# EAGLE board de0-nano_RMII (EAGLE 8.0.2)
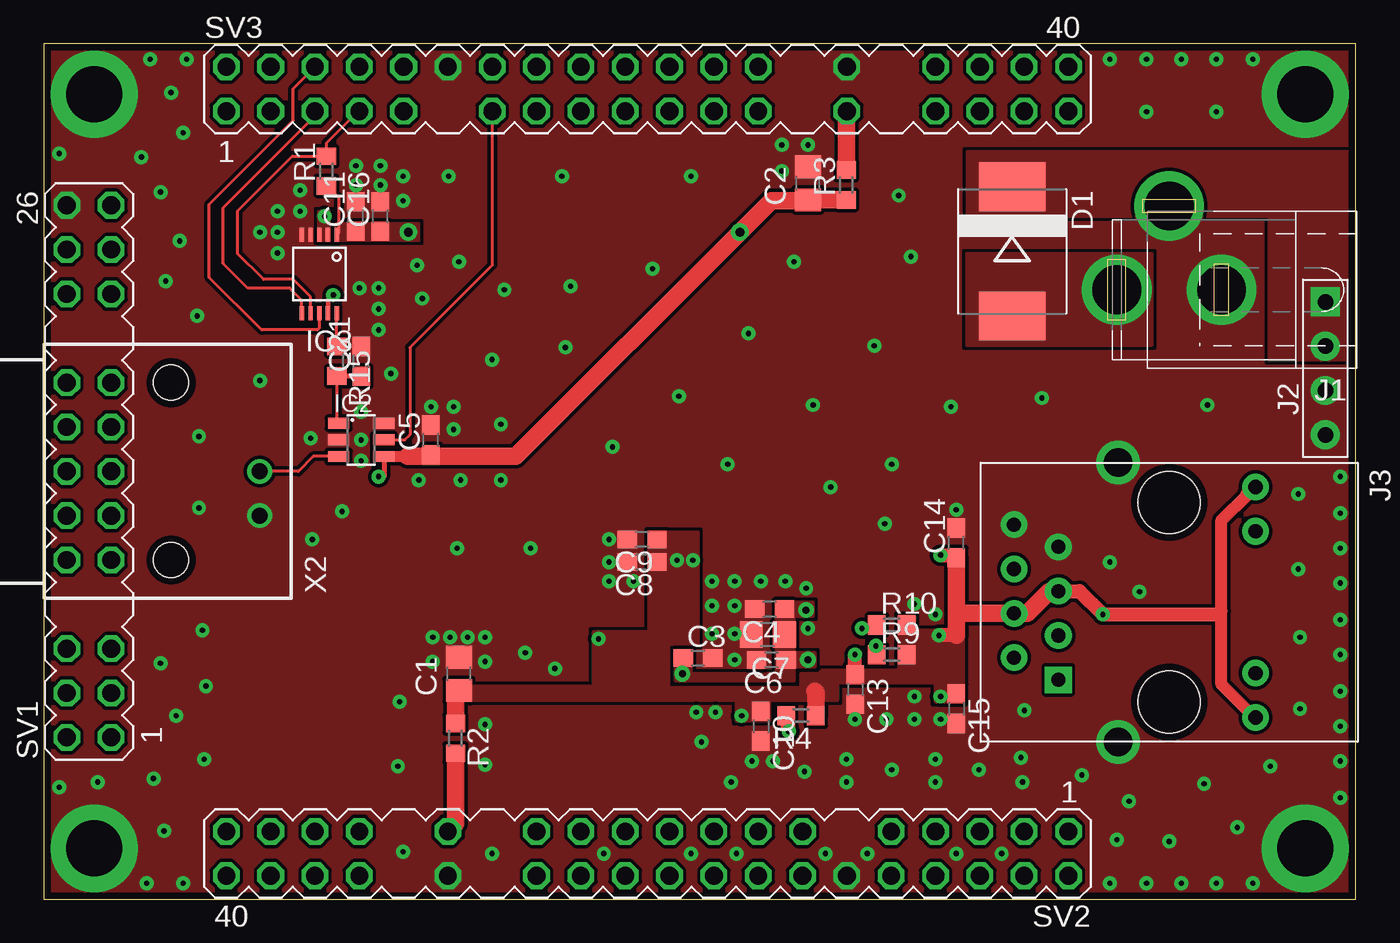
[diagram p0: board, top side]
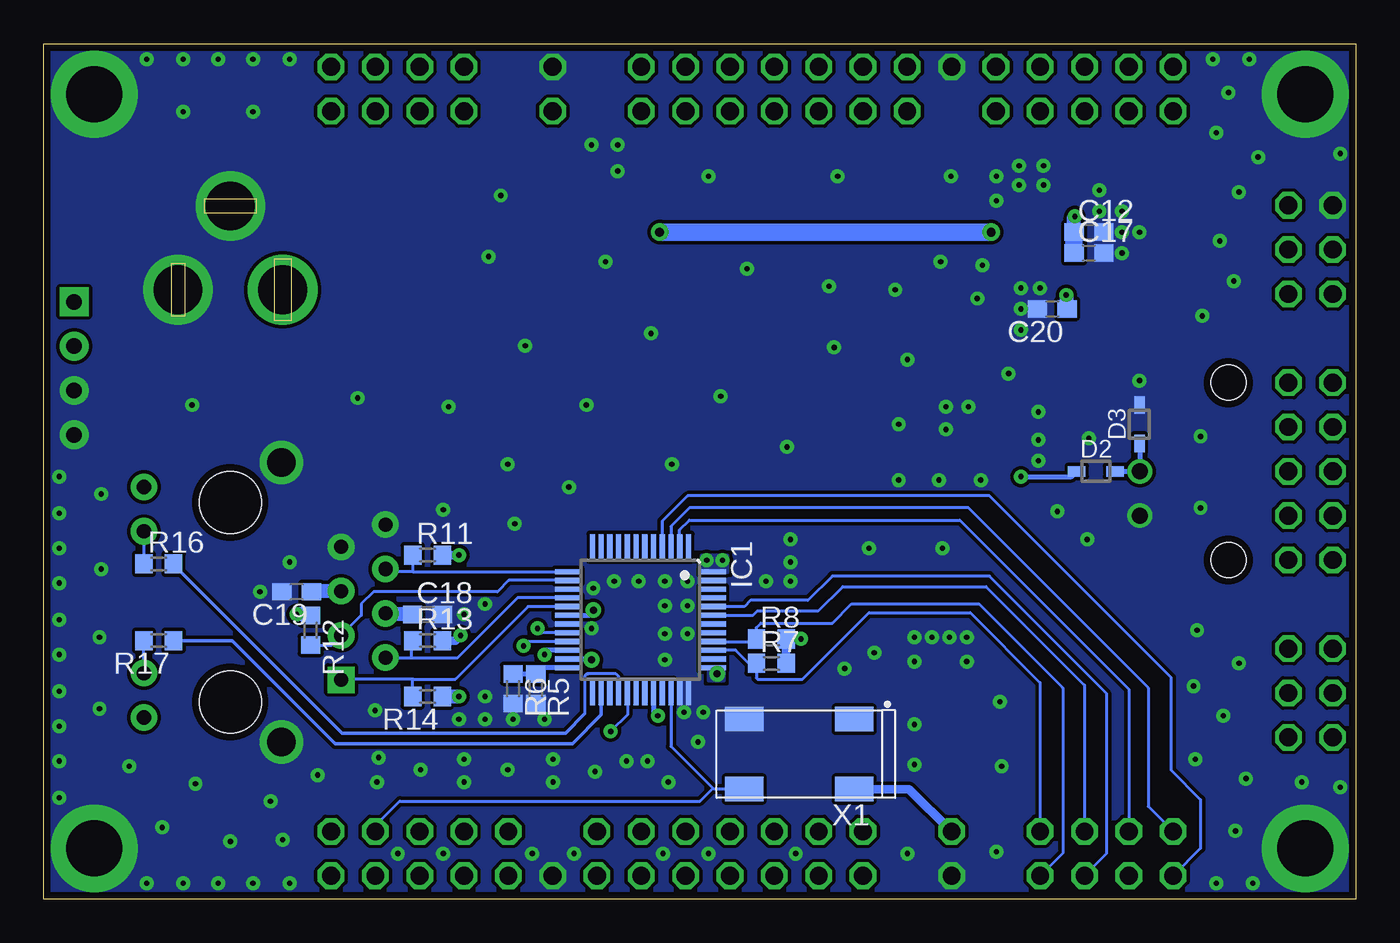
[diagram p1: board, bottom side, seen from below]

Size 75.2 x 49 mm. Coordinates in mm from the lower left corner, seen from the top.
Outline: 0,0 75.2,0 75.2,49 0,49 0,0
Copper layers (1*16): Top 0.018mm / dielectric 1.5mm / Bottom 0.018mm
Design rules "default *": minimum track width 0.18mm, minimum drill 0.3mm, track to track 0.2mm, track to pad 0.2mm, pad to pad 0.2mm, via to via 0.2mm, smd to smd 0.2mm, copper to edge 0.4mm, drill to drill 8mil, minimum pad ring 10mil, minimum via ring 8mil, stop-mask expansion 4mil, vias tented up to drill 0.4mm, thermal gap 10mil

## Footprints (pad centres in the part's own frame; a part is rotated, then mirrored left to right if it is on the bottom)
C0805 = smd 1.3 x 1.5: 1 -0.95,0; 2 0.95,0
C0603 = smd 1.1 x 1: 1 -0.85,0; 2 0.85,0
SMC = smd 2.8 x 3.8: A 3.7,0; C -3.7,0
SOD323 = smd 1 x 0.6: 1 -1.1,0; 2 1.1,0
LQFP48 = smd 1.5 x 0.3: 1 -4.15,2.75; 2 -4.15,2.25; 3 -4.15,1.75; 4 -4.15,1.25; 5 -4.15,0.75; 6 -4.15,0.25; 7 -4.15,-0.25; 8 -4.15,-0.75; 9 -4.15,-1.25; 10 -4.15,-1.75; 11 -4.15,-2.25; 12 -4.15,-2.75; 25 4.15,-2.75; 26 4.15,-2.25; 27 4.15,-1.75; 28 4.15,-1.25; 29 4.15,-0.75; 30 4.15,-0.25; 31 4.15,0.25; 32 4.15,0.75; 33 4.15,1.25; 34 4.15,1.75; 35 4.15,2.25; 36 4.15,2.75 | smd 0.3 x 1.5: 13 -2.75,-4.15; 14 -2.25,-4.15; 15 -1.75,-4.15; 16 -1.25,-4.15; 17 -0.75,-4.15; 18 -0.25,-4.15; 19 0.25,-4.15; 20 0.75,-4.15; 21 1.25,-4.15; 22 1.75,-4.15; 23 2.25,-4.15; 24 2.75,-4.15; 37 2.75,4.15; 38 2.25,4.15; 39 1.75,4.15; 40 1.25,4.15; 41 0.75,4.15; 42 0.25,4.15; 43 -0.25,4.15; 44 -0.75,4.15; 45 -1.25,4.15; 46 -1.75,4.15; 47 -2.25,4.15; 48 -2.75,4.15
TSOT23-6 = smd 0.62 x 1.22: 1 -0.95,-1.3; 2 0,-1.3; 3 0.95,-1.3; 4 0.95,1.3; 5 0,1.3; 6 -0.95,1.3
SO10 = smd 0.25 x 0.8: 1 -1,-2.25; 2 -0.5,-2.25; 3 0,-2.25; 4 0.5,-2.25; 5 1,-2.25; 6 1,2.25; 7 0.5,2.25; 8 0,2.25; 9 -0.5,2.25; 10 -1,2.25
SPC4078 = drill 2.8 pad 4: 1 -3,0; 2 0,-4.8; 3 3,0
4P-65/35MIL = drill 0.889 pad 1.651 square: 1 0,3.81 | drill 0.889 pad 1.651: 2 0,1.27; 3 0,-1.27; 4 0,-3.81
RJ45 = drill 0.813 pad 1.524: G+ 4.953,-6.604; G- 4.953,-4.064; GND -8.89,4.445; NC -6.35,3.175; P4 -8.89,-0.635; P5 -6.35,0.635; RD+ -6.35,-1.905; RD- -8.89,1.905; TD- -8.89,-3.175; Y+ 4.953,6.604; Y- 4.953,4.064 | drill 1.651 pad 2.159: SHIELD0 -2.921,8.001; SHIELD1 -2.921,-8.001 | drill 0.813 pad 1.524 square: TD+ -6.35,-4.445 | hole 3.556: 0,-5.715; 0,5.715
R0603 = smd 1 x 1.1: 1 -0.85,0; 2 0.85,0
MA13-2_ALT = drill 1.016 octagon: 1 -15.24,-1.27; 2 -15.24,1.27; 3 -12.7,-1.27; 4 -12.7,1.27; 5 -10.16,-1.27; 6 -10.16,1.27; 9 -5.08,-1.27; 10 -5.08,1.27; 11 -2.54,-1.27; 12 -2.54,1.27; 13 0,-1.27; 14 0,1.27; 15 2.54,-1.27; 16 2.54,1.27; 17 5.08,-1.27; 18 5.08,1.27; 21 10.16,-1.27; 22 10.16,1.27; 23 12.7,-1.27; 24 12.7,1.27; 25 15.24,-1.27; 26 15.24,1.27
MA20-2_ALT = drill 1.016 octagon: 1 -24.13,-1.27; 2 -24.13,1.27; 3 -21.59,-1.27; 4 -21.59,1.27; 5 -19.05,-1.27; 6 -19.05,1.27; 7 -16.51,-1.27; 8 -16.51,1.27; 9 -13.97,-1.27; 10 -13.97,1.27; 12 -11.43,1.27; 13 -8.89,-1.27; 14 -8.89,1.27; 15 -6.35,-1.27; 16 -6.35,1.27; 17 -3.81,-1.27; 18 -3.81,1.27; 19 -1.27,-1.27; 20 -1.27,1.27; 21 1.27,-1.27; 22 1.27,1.27; 23 3.81,-1.27; 24 3.81,1.27; 25 6.35,-1.27; 26 6.35,1.27; 29 11.43,-1.27; 30 11.43,1.27; 33 16.51,-1.27; 34 16.51,1.27; 35 19.05,-1.27; 36 19.05,1.27; 37 21.59,-1.27; 38 21.59,1.27; 39 24.13,-1.27; 40 24.13,1.27
7.5X5-4-PAD = smd 2.2 x 1.4: 1 -3.15,-2; 2 3.15,-2; 3 3.15,2; 4 -3.15,2
AMP_227161 = drill 0.9 pad 1.27: 1 0,-5.08; 2 -2.54,-5.08 | hole 2: -5.08,0; 5.08,0

## Placement (x,y rotation side)
C1  10uF  [C0805]  23.8,12.9 90 top
C2  10uF  [C0805]  43.8,41 90 top
C3  100nF  [C0603]  37.5,13.8 0 top
C4  100nF  [C0603]  41.6,16.6 180 top
C5  100nF  [C0603]  22.2,26.3 90 top
C6  100nF  [C0603]  41.7,13.7 180 top
C7  10uF  [C0805]  41.5,15.15 180 top
C8  100nF  [C0603]  34.3,19.3 180 top
C9  100nF  [C0603]  34.3,20.6 180 top
C10  100nF  [C0603]  41.1,9.9 270 top
C11  100nF  [C0603]  17.9,39.1 90 top
C12  100nF  [C0603]  15.3,38.2 0 bottom
C13  100nF  [C0603]  46.5,12 270 top
C14  100nF  [C0603]  52.3,20.4 90 top
C15  100nF  [C0603]  52.3,10.9 270 top
C16  100nF  [C0603]  19.3,39.1 90 top
C17  100nF  [C0603]  15.3,37 0 bottom
C18  100nF  [C0603]  53.2,16.3 0 bottom
C19  100nF  [C0603]  60.7,17.6 180 bottom
C20  100nF  [C0603]  17.4,33.8 180 bottom
C21  100nF  [C0603]  18.2,30.8 90 top
D1  [SMC]  55.5,37.1 270 top
D2  [SOD323]  14.9,24.5 0 bottom
D3  [SOD323]  12.4,27.2 90 bottom
IC1  DP83848  [LQFP48]  41,16 270 bottom
IC2  [TSOT23-6]  18.2,26.3 270 top
IC3  AD5683  [SO10]  15.8,35.8 180 top
J1  [SPC4078]  64.5,34.9 180 top
J2  [4P-65/35MIL]  73.45,30.4 0 top
J3  [RJ45]  64.5,17 0 top
R1  4k7  [R0603]  16.2,41.7 90 top
R2  BLM  [R0603]  23.6,9.2 270 top
R3  BLM  [R0603]  46,40.9 90 top
R4  4k7  [R0603]  43.4,10.5 180 top
R5  12k 1%  [R0603]  47,12.05 270 bottom
R6  8k2 1%  [R0603]  48.3,12.05 270 bottom
R7  2k 1%  [R0603]  33.5,13.5 0 bottom
R8  2k 1%  [R0603]  33.5,14.9 0 bottom
R9  2k 1%  [R0603]  48.6,14 0 top
R10  2k 1%  [R0603]  48.6,15.7 0 top
R11  51R  [R0603]  53.2,19.7 0 bottom
R12  51R  [R0603]  59.9,15.4 270 bottom
R13  51R  [R0603]  53.2,14.8 0 bottom
R14  51R  [R0603]  53.2,11.6 180 bottom
R15  51R  [R0603]  16.8,30.8 270 top
R16  330R  [R0603]  68.6,19.2 0 bottom
R17  330R  [R0603]  68.6,14.8 180 bottom
SV1  [MA13-2_ALT]  2.6,24.5 90 top
SV2  [MA20-2_ALT]  34.6,2.6 180 top
SV3  [MA20-2_ALT]  34.6,46.4 0 top
X1  CRYSTALS-GND-LID12SMX-B-4-PAD  [7.5X5-4-PAD]  31.9,8.3 180 bottom
X2  1-227161-2  [AMP_227161]  7.3,24.5 90 top

## Library data of the parts
C1-C21 R1-R17 = resistor
D1 = diode
D2 D3 = zetex; MPN: CDSOD323-T05C; OC_FARNELL: 1824860; OC_NEWARK: 79R6078
IC1 = national-semiconductor; MPN: DP83848VYB; OC_FARNELL: 1286817; OC_NEWARK: 11N4484
IC2 = linear-technology
IC3 = analog-devices; MPN: SSM2167Z-EVAL; OC_FARNELL: 1424672; OC_NEWARK: 65M4647
J1 = con-jack; OC_FARNELL: unknown; OC_NEWARK: unknown
J2 J3 = seeed_connector
SV1-SV3 = con-lstb
X1 = IQD-Frequency-Products
X2 = con-coax; OC_FARNELL: unknown; OC_NEWARK: unknown

## Nets
3V3: C1.1 C8.1 C9.1 C10.1 C13.1 C14.1 C15.1 C18.1 C19.1 IC1.22 IC1.32 IC1.48 J3.G+ J3.P4 J3.P5 J3.Y+ R2.1 R4.1 R7.2 R8.2 R9.2 R10.2 R11.2 R12.1 R13.2 R14.1
3V3_A: C2.1 C5.1 C11.1 C16.1 D2.1 IC2.4 IC3.1 R1.1 R3.1
COM_OUT: IC2.5 SV3.13
CRS_DV: IC1.40 R8.1 SV2.34
DAC_CLK: IC3.6 SV3.5
DAC_NCS: IC3.7 R1.2 SV3.7
DAC_SDI: IC3.8 SV3.6
GND: C1.2 C2.2 C3.2 C4.2 C5.2 C6.2 C7.2 C8.2 C9.2 C10.2 C11.2 C12.2 C13.2 C14.2 C15.2 C16.2 C17.2 C18.2 C19.2 C20.2 C21.2 D3.2 IC1.15 IC1.19 IC1.35 IC1.36 IC1.47 IC2.2 IC2.6 IC3.4 IC3.5 J1.1 J1.2 J2.3 J2.4 J3.GND J3.NC J3.SHIELD0 J3.SHIELD1 R5.2 R6.2 SV1.26 SV2.12 SV2.30 SV3.12 SV3.30 X1.2 X2.2
LED_ACT: IC1.26 R17.1
LED_LINK: IC1.28 R16.2
MDC: IC1.31
MDIO: IC1.30
N$1: R3.2 SV3.29
N$3: IC1.21 R9.1
N$4: J3.Y- R16.1
N$5: IC1.20 R10.1
N$6: J3.G- R17.2
N$8: IC3.10 R15.1
N$9: IC1.24 R5.1 R6.1
N$13: C20.1 IC3.9
OSCIN: IC1.34 SV2.3 X1.3
PFB: C3.1 C4.1 C6.1 C7.1 IC1.18 IC1.23 IC1.37
RAW_3V3: R2.2 SV2.29 X1.4
RST_N: IC1.29 R4.2
RX+: IC1.14 J3.RD+ R12.2
RX-: IC1.13 J3.RD- R11.1
RX_DV: IC1.39 R7.1 SV2.33
RXD_0: IC1.43 SV2.35
RXD_1: IC1.44 SV2.36
SIG_IN: D2.2 D3.1 IC2.3 X2.1
THR_LVL: C21.1 IC2.1 R15.2
TX+: IC1.17 J3.TD+ R14.2
TX-: IC1.16 J3.TD- R13.1
TX_EN: IC1.2 SV2.37
TXD_0: IC1.3 SV2.39
TXD_1: IC1.4 SV2.40
V_RAW: D1.A J1.3
VCC_SYS: D1.C J2.1 J2.2
VLOGIC: C12.1 C17.1 IC3.2 IC3.3

## Tracks (layer width: path | path; a pad name or v marks a point on that pad's centre or on a via)
3V3  (via drill 0.3 pad 0.8)
  Top 0.18: 23.6,11.75 C1.1
  Top 0.5: 55.58,16.4 J3.P4
  Top 0.7: 67.5,16.5 67.3,16.3 | 67.5,16.5 67.5,21.7 69,23.2 | 69.4,10.4 67.5,12.3 67.5,16.5
  Top 0.8: C13.1 v46.5,14 | J3.P5 59.37,17.64 v60.7,16.3 67.3,16.3 | 69,23.2 69.15,23.3 J3.Y+ | J3.G+ 69.4,10.4 | v51.4,19.7 52.15,19.7 C14.1 | 52.3,15.1 v51.3,15.1
  Top 1: J3.P5 58.12,17.6 57.6,17.6 56.37,16.36 J3.P4 52.37,16.36 52.3,16.3 | 52.3,16.3 C14.1 | 52.3,16.3 52.3,15.1 | R4.1 44.25,11.85 44.2,11.9 | R2.1 23.6,11.75
  Bottom 0.18: 55.55,16.3 J3.P4 | 59.81,17.64 C19.1
  Bottom 0.3: IC1.22 46.45,14.25 v46.5,14 | IC1.32 40.25,10.55 v40,10.5
  Bottom 0.5: R13.2 51.6,14.8 v51.3,15.1 | R7.2 R8.2 v31.8,14.9 | R11.2 v51.4,19.7
  Bottom 0.8: C18.1 55.55,16.3 | J3.P5 59.81,17.64 | v51.4,11.6 R14.1 | R12.1 arc-90 59.95,16.3 v60.7,16.3
  other vias: 37.2,19.4 36.3,19.4
  pour Bottom (no thermals): 36,19.7 37.5,19.7 37.5,18.7 36,18.7
  pour Top (no thermals): 44.6,13.1 49,13.1 49,16.2 49.9,16.2 49.9,15.4 52.7,15.4 52.7,11.3 51.1,11.3 51.1,12.4 45.5,12.4 45.5,11.4 41.6,11.4 41.6,10.2 39.7,10.2 39.7,11.4 23.6,11.4 23.6,12.2 31.5,12.2 31.5,15.3 34.7,15.3 34.7,21 37.5,21 37.5,14.6 35.8,14.6 35.8,12.09 43.4,12.09 43.4,12.9 44.4,12.9
3V3_A  (via drill 0.3 pad 0.8, 0.5 pad 1)
  Top 0.18: C5.1 21.8,25.45 21.7,25.35 | C16.1 19.45,38.25 | R1.1 16.25,40.85 16.9,40.2 16.9,38.15 IC3.1
  Top 0.3: IC2.4 19.5,24.2 v19.2,24.2
  Top 0.6: 43.75,40 C2.1
  Top 0.62: IC2.4 20.85,25.35
  Top 1: R3.1 C2.1 | 43.75,40 41.7,40 v39.9,38.2 27.05,25.35 21.7,25.35 20.85,25.35
  Bottom 0.3: v19.2,24.2 16.3,24.2 D2.1
  Bottom 1: v20.9,38.2 v39.9,38.2
  pour Top (no thermals): 16.75,37.7 16.75,38.7 21.5,38.7 21.5,37.7
COM_OUT
  Top 0.18: IC2.5 20.7,26.3 21,26.6 21,31.6 25.71,36.31 SV3.13
CRS_DV
  Bottom 0.18: R8.1 34.35,14.75 | R8.1 34.35,15.55 34.1,15.8 30,15.8 28.9,16.9 21.6,16.9 16.8,12.1 16.8,2.62 SV2.34 | IC1.40 34.5,14.75 R8.1
DAC_CLK
  Top 0.18: IC3.6 14.8,34.3 14.1,35 11.7,35 10.3,36.4 10.3,39.6 15.2,44.5 15.2,44.78 SV3.5
DAC_NCS
  Top 0.18: IC3.7 15.3,34.5 14.3,35.5 12.6,35.5 11.1,37 11.1,39.4 14.25,42.55 R1.2 16.2,43.3 18.03,45.13 SV3.7
DAC_SDI
  Top 0.18: IC3.8 15.8,32.7 15.7,32.6 12.5,32.6 9.5,35.6 9.5,39.8 14.3,44.6 14.3,46.42 SV3.6
GND  (via drill 0.3 pad 0.8, 3.2 pad 5)
  other vias: 2.9,46.1 2.9,2.9 72.3,46.1 72.3,2.9 38.3,18.2 43.7,17.8 38.5,10.7 62.8,17.6 51.1,16.3 46.5,10.3 48.3,10.3 43.8,15.5 39.6,16.8 39.6,15.2 39.6,13.7 38.3,15.2 38.3,16.8 51.4,10.3 49.9,16.9 49.9,10.3 56.2,10.8 52.3,22.3 37.4,10.7 40.6,7.9 32.4,18.2 32.4,19.3 32.4,20.6 39.6,18.2 41.1,18.2 42.5,18.2 49.9,11.6 61.1,19.3 23.3,15 24.3,15 22.3,13.6 25.3,13.6 22.3,15 25.3,15 41.8,7.9 33.8,18.2 46,6.7 51.1,6.7 56.1,6.7 27.6,14.1 29.3,13.2 23.5,26.9 22.2,28.2 23.5,28.2 42.3,41.7 43.8,43.2 42.3,43.2 45.1,23.6 48.2,21.5 48.6,24.9 39.2,24.9 32.6,25.9 23.7,20.1 27.9,20.1 62.2,5.6 13.4,37 13.4,38.2 13.4,39.4 14.7,39.4 19.2,33.8 19.2,32.6 18.1,35 19.2,35 12.4,38.2 14.7,40.6 17.9,40.9 19.3,40.9 17.9,42 19.3,42 20.6,40 20.6,41.4 18.2,26.3 15.3,26.4 21.5,24 23.9,24 26.2,24 18.2,25.1 18.2,27.9 12.4,29.7 40.4,32.4 44.1,28.3 47.6,31.7 25.7,30.9 30.2,35.1 7.6,10.5 9.1,15.4 49,40.3 52,28.2 57.2,28.7 66.7,28.3 66.5,6.6 64.5,3.3 63.2,45.1 67.2,45.1 70.3,7.6 36.4,28.8 43,36.5 29.9,31.6 29.7,41.4 37.1,41.4 7,35.4 6.7,40.5 8,43.9 20.3,7.6 20.4,11.3 71.9,18.9 72,15 21.4,36.3 26.2,27.2 34.9,36.1 26.4,34.9 63.2,48.1 67.2,48.1 65.2,48.1 61.1,48.1 69.3,48.1 63.2,0.9 67.2,0.9 65.2,0.9 61.1,0.9 69.3,0.9 74.3,7.9 74.3,11.9 74.3,9.9 74.3,5.8 74.3,14 74.3,18.1 74.3,22.1 74.3,20.1 74.3,16 74.3,24.2 8,0.9 5.9,0.9 0.9,6.4 0.9,42.7 9.2,8 6.7,13.5 9.3,12.2 6.3,6.9 6.9,3.9 3.1,6.7 7.3,46.2 5.6,42.5 7.8,37.7 8.8,33.4 15.4,20.6 17.1,22.2 8.9,22.4 8.9,26.5 19.9,30.1 21.7,34.4 23.8,36.5 23.2,41.4 8.2,48.1 6.1,48.1 68.4,4.1 49.7,36.8 46,8 51.1,8 56,8.1 53.6,7.4 48.6,7.4 43.6,7.3 39.4,6.7 37.7,9 44.8,2.6 47.2,2.6 25.7,2.6 20.6,2.7 37.1,2.6 32.1,2.6 39.7,2.6 52.3,2.6 54.9,2.6 25.3,7.7 25.3,10 59.5,7.1 61.5,3.4 71.9,23.2 72,10.9
  pour Bottom (rank 2, no thermals): -1,50 -1,-1 75.5,-1 75.5,50
  pour Top (rank 2, no thermals): -0.5,49.5 -0.5,-0.5 76,-0.5 76,49.5
LED_ACT
  Bottom 0.2: IC1.26 43.25,10.55 44.9,8.9 58.5,8.9 64.4,14.8 R17.1
LED_LINK
  Bottom 0.18: IC1.28 42.25,12.75 42.4,12.9 44,12.9 arc-90 44.2,12.7 44.2,10.6
  Bottom 0.2: R16.2 67.75,19.15 58.1,9.5 45.3,9.5 44.2,10.6
N$1
  Top 1: SV3.29 46,45.13 R3.2
N$3  (via drill 0.3 pad 0.8)
  Top 0.18: R9.1 47.75,14.45 v47.7,14.5
  Bottom 0.18: IC1.21 47.45,14.75 v47.7,14.5
N$4
  Bottom 0.18: R16.1 J3.Y-
N$5  (via drill 0.3 pad 0.8)
  Top 0.18: v46.9,15.5 47.55,15.5 R10.1
  Bottom 0.18: v46.9,15.5 46.65,15.25 IC1.20
N$6
  Bottom 0.18: J3.G- R17.2
N$8
  Top 0.18: R15.1 IC3.10
N$9
  Bottom 0.18: R5.1 46.6,13.25
  Bottom 0.3: IC1.24 46.6,13.25 | R6.1 R5.1
N$13  (via drill 0.3 pad 0.8)
  Top 0.25: IC3.9 16.3,34.3
  Top 0.3: 16.3,34.3 v16.6,34.6
  Bottom 0.18: 16.6,33.85 C20.1
  Bottom 0.8: v16.6,34.6 16.6,33.85
OSCIN
  Bottom 0.18: IC1.34 39.25,8.75 36.85,6.35 | SV2.3 56.19,4.21 54.8,5.6 37.6,5.6 36.85,6.35 | X1.3 36.8,6.3 36.85,6.35
PFB  (via drill 0.4 pad 0.9)
  Bottom 0.3: IC1.18 43.95,16.25 v43.7,16.55 | IC1.23 43.85,13.75 v43.8,13.7
  other vias: 36.6,12.9
  pour Top (no thermals): 44.1,17 44.1,16.2 43,16.2 43,14.1 44.2,14.1 44.2,13.3 43,13.3 43,12.5 36.2,12.5 36.2,14.2 37.1,14.2 37.1,12.9 42,12.9 42,17
  pour Bottom (no thermals): 36.2,13.3 37.1,13.3 37.1,12.5 36.2,12.5
RAW_3V3
  Top 1: R2.2 23.6,4.3 SV2.29
  Bottom 0.5: SV2.29 25.6,6.3 X1.4
RST_N  (via drill 0.3 pad 0.8)
  Top 0.18: 42.6,10.45 R4.2
  Top 0.8: v42.7,9.6 42.6,10.45
  Bottom 0.18: IC1.29 41.75,10.55 v42.7,9.6
RX+
  Bottom 0.18: IC1.14 48.55,18.25 49.2,17.6 56.3,17.6 57,16.9 57,16.25 J3.RD+ | J3.RD+ | R12.2 58.7,14.55 J3.RD+
RX-
  Bottom 0.18: J3.RD- 55.45,18.75 54.05,18.75 | 54.05,18.75 IC1.13 | R11.1 54.05,18.75
RX_DV
  Bottom 0.18: IC1.39 35.55,14.25 34.8,13.5 R7.1 34.35,12.65 34.3,12.6 31.7,12.6 27.9,16.4 22.1,16.4 18.1,12.4 SV2.33
RXD_0
  Bottom 0.18: SV2.35 15.55,12.25 21.2,17.9 29.4,17.9 30.8,16.5 34.3,16.5 34.55,16.25 IC1.43
RXD_1
  Bottom 0.18: SV2.36 14.3,2.58 14.3,11.8 21,18.5 30,18.5 31.4,17.1 34.7,17.1 35.05,16.75 IC1.44
SIG_IN
  Top 0.18: IC2.3 15.45,25.35 14.6,24.5 X2.1
  Bottom 0.3: D3.1 12.38,26.1 X2.1 D2.2
THR_LVL
  Top 0.18: 16.85,30.35 R15.2 16.8,27.35 IC2.1
  Top 0.3: C21.1 R15.2
TX+
  Bottom 0.18: IC1.17 47.45,16.75 51.6,12.6 54,12.6 | 54,12.6 58.1,12.6 J3.TD+ | R14.2 54.05,12.55 54,12.6
TX-
  Bottom 0.18: IC1.16 48.05,17.25 51.5,13.8 54.1,13.8 | 54.1,13.8 55.59,13.8 J3.TD- | 54.1,13.8 54.1,14.75 R13.1
TX_EN
  Bottom 0.18: IC1.2 38.75,21.15 38.2,21.7 22.7,21.7 13.01,12.01 SV2.37
TXD_0
  Bottom 0.18: IC1.3 39.25,21.35 38.2,22.4 22.2,22.4 11.9,12.1 11.9,5.3 SV2.39
TXD_1
  Bottom 0.18: IC1.4 39.75,21.65 38.3,23.1 21,23.1 10.6,12.7 10.6,7.4 8.9,5.7 8.9,2.9 SV2.40
V_RAW
  pour Top (no thermals): 52.9,37 63.5,37 63.5,31.7 52.9,31.7
VCC_SYS
  pour Top (no thermals): 52.9,39.1 70.2,39.1 70.2,30.9 74.8,30.9 74.8,42.8 52.9,42.8
VLOGIC  (via drill 0.3 pad 0.8)
  Bottom 0.18: 16.15,39.05 v16.1,39.1
  Bottom 0.8: C12.1 16.15,39.05
  Bottom 1: C17.1 C12.1
  pour Top (no thermals): 15.75,37.7 15.75,39.4 16.35,39.4 16.35,37.7